# Altium PCB LaserProtection_V10.PcbDoc
Units mm, origin at the board's own origin, x right, y up, seen from the top; angles counter-clockwise.
Board outline 70 x 57 mm, 4 copper layers (Top Layer, Signal Layer 1, Signal Layer 2, Bottom Layer), stack 1.538 mm thick; 101 components, 52 nets, 241 pads, 243 vias.
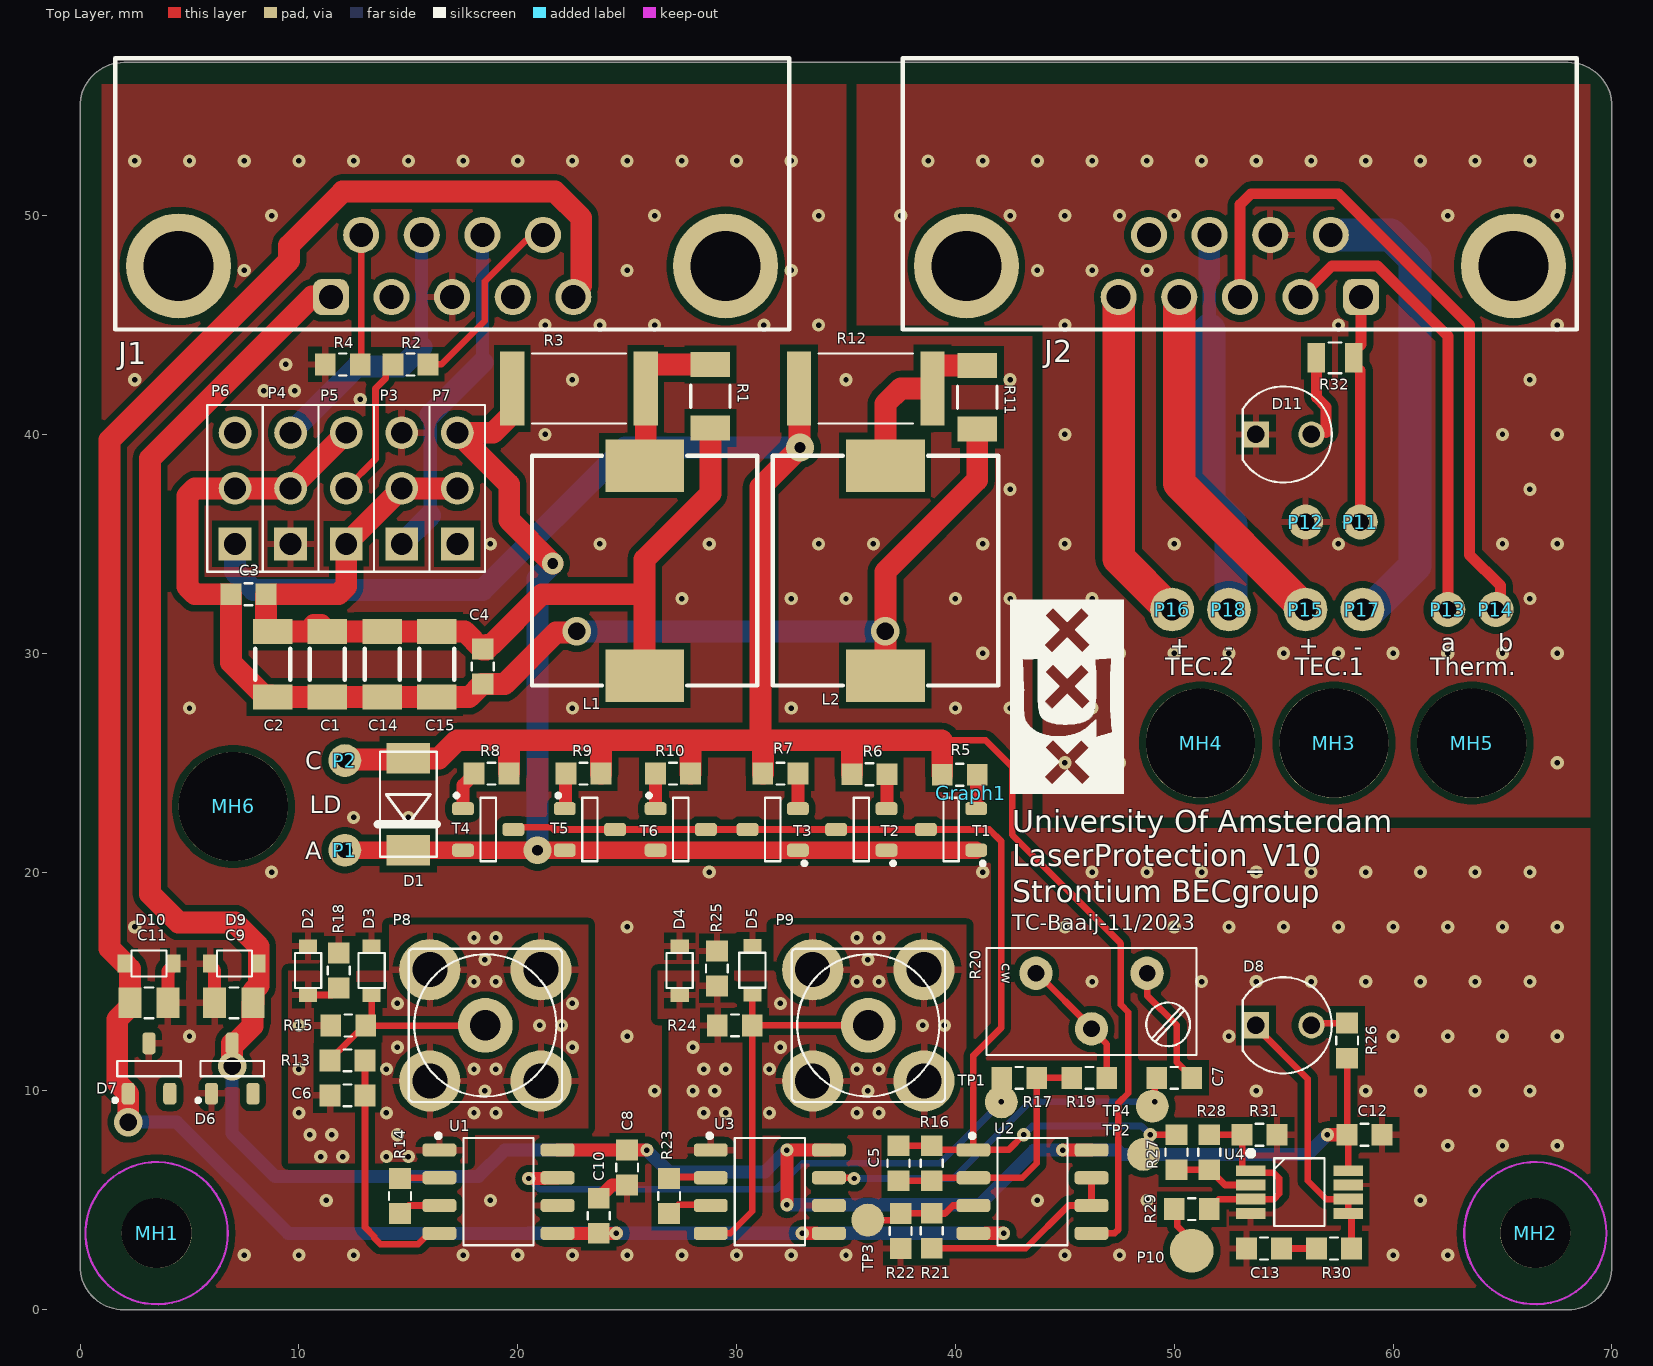
[diagram p0: Top Layer view]
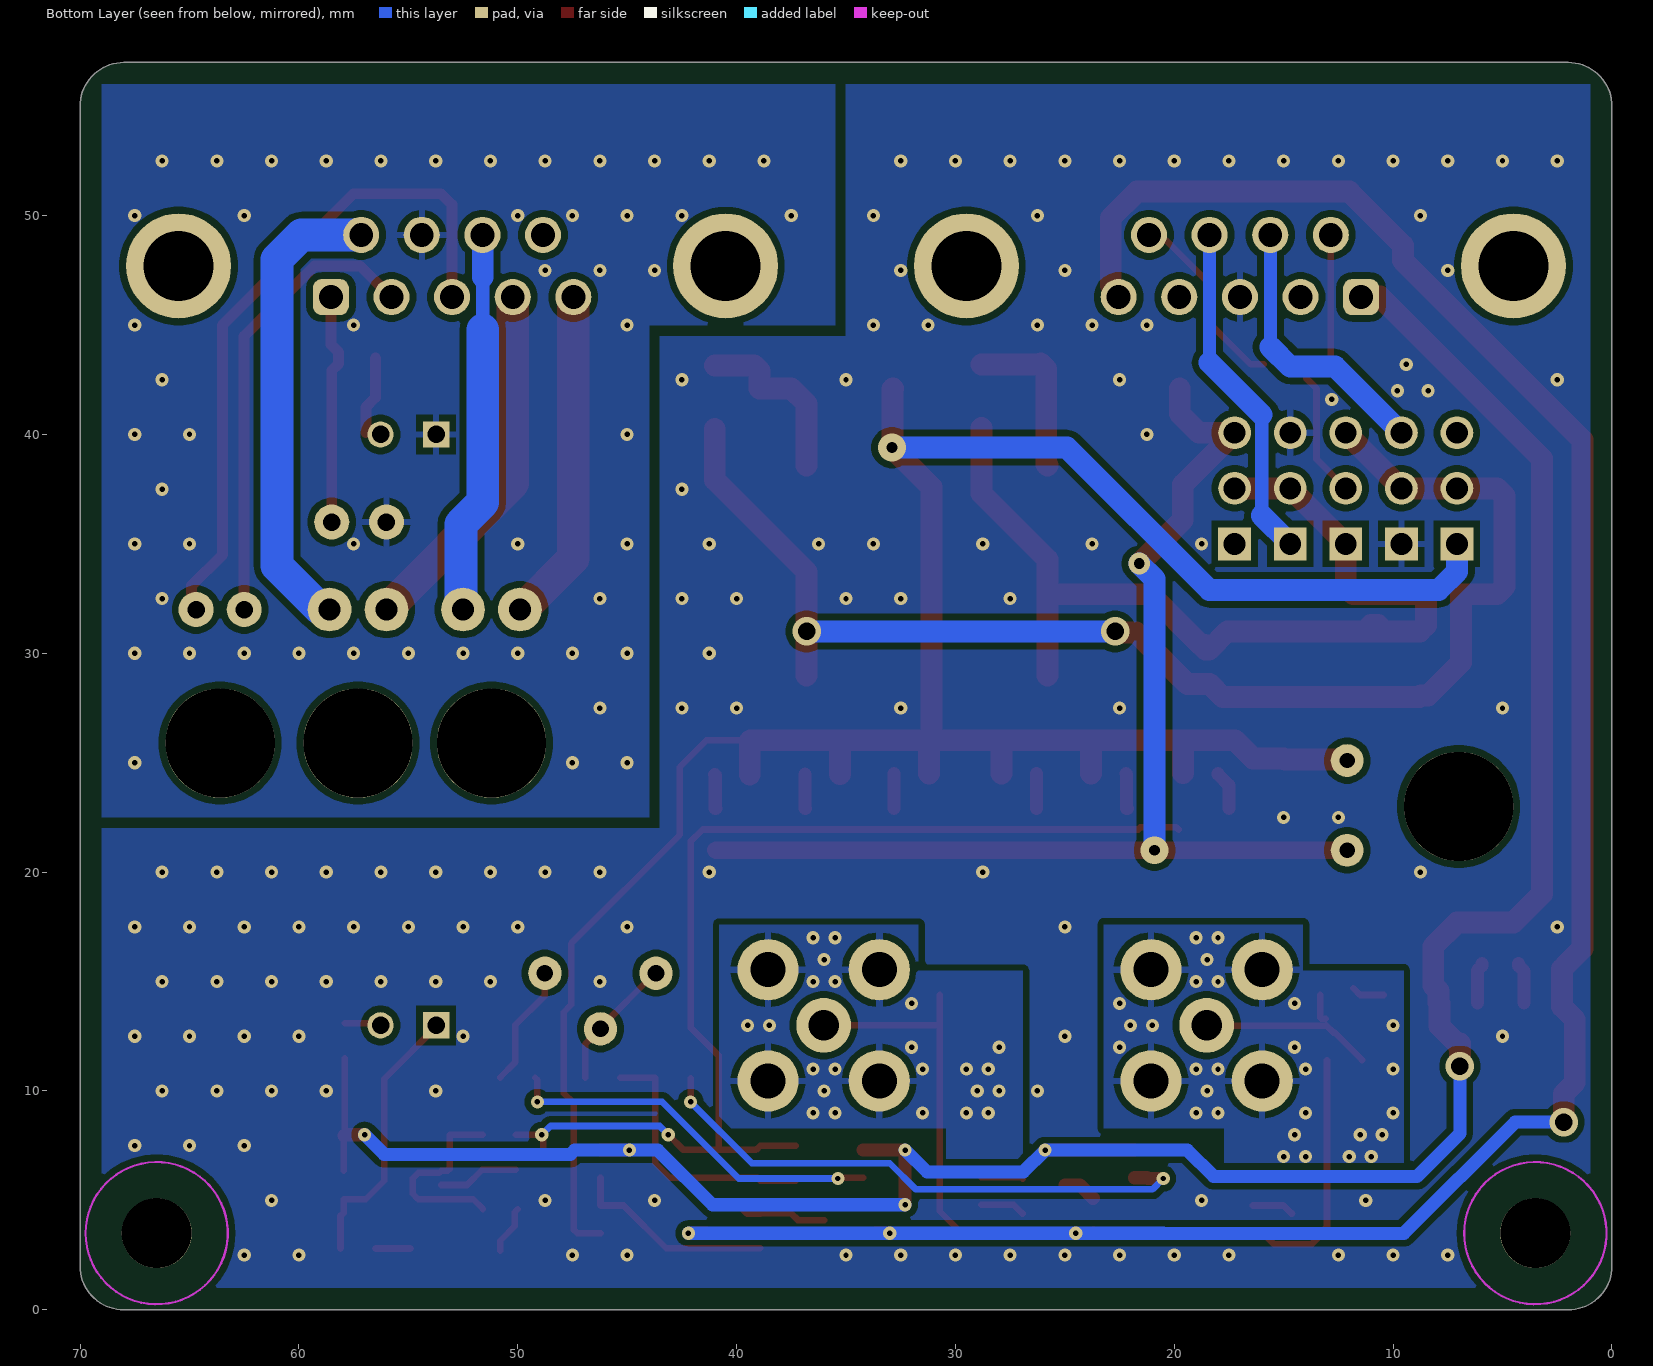
[diagram p1: Bottom Layer view, seen from below]

## Layer stack, top to bottom
Top Solder: solder mask 0.0102, Solder Resist, Dk 3.5
Top Layer: signal copper 0.018
Dielectric1: prepreg 0.36, FR-4, Dk 4.8
Signal Layer 1: signal copper 0.036
Dielectric 3: core 0.71, Dk 4.2
Signal Layer 2: signal copper 0.036
Dielectric 2: prepreg 0.36, Dk 4.8
Bottom Layer: signal copper 0.018
Bottom Solder: solder mask 0.0102, Solder Resist, Dk 3.5

## Board outline
0,2 0,55 cw(c2,55) 2,57 68,57 cw(c68,55) 70,55 70,2 cw(c68,2) 68,0 2,0 cw(c2,2)

## Design rules (kind name [scope] priority, off if disabled: settings)
BoardOutlineClearance BoardOutlineClearance-Inner [OnCopper and not (OnBottom or OnTop)] p1: gap=0.4 ignorepadtopadclearanceinfootprint=FALSE except(0: Arc-SplitContinuation Track-SplitContinuation SMDPad-SplitContinuation THPad-SplitContinuation Via-SplitContinuation Fill-SplitContinuation Poly-SplitContinuation Region-SplitContinuation Text-SplitContinuation)
BoardOutlineClearance BoardOutlineClearance-TopBot [OnCopper and (OnTop or OnBottom)] p2: gap=0.25 ignorepadtopadclearanceinfootprint=FALSE except(0: Arc-SplitContinuation Track-SplitContinuation SMDPad-SplitContinuation THPad-SplitContinuation Via-SplitContinuation Fill-SplitContinuation Poly-SplitContinuation Region-SplitContinuation Text-SplitContinuation)
Clearance [All] p1: gap=0.15 ignorepadtopadclearanceinfootprint=FALSE except(0: Arc-Hole Track-Hole SMDPad-Hole THPad-Hole Via-Hole Fill-Hole Poly-Hole Region-Hole Text-Hole; 0.3: Arc-Fill Arc-Poly Arc-Region Track-Fill Track-Poly Track-Region SMDPad-Fill SMDPad-Poly SMDPad-Region THPad-Fill THPad-Poly THPad-Region Via-Fill Via-Poly Via-Region Fill-Fill Fill-Poly Fill-Region Poly-Poly Poly-Region Region-Region)
ComponentClearance [All] p1: gap=0.01 collisioncheckmode=3 verticalgap=0.25 showdistances=FALSE
DiffPairsRouting DiffPairsRouting-100 [All] p1: maxlimit=0.15 minlimit=0.15 mostfreqgap=0.15 toplayer_minwidth=0.15 toplayer_maxwidth=0.42 toplayer_prefwidth=0.42 midlayer1_minwidth=0.15 midlayer1_maxwidth=0.42 midlayer1_prefwidth=0.42 midlayer2_minwidth=0.15 midlayer2_maxwidth=0.42 midlayer2_prefwidth=0.42 bottomlayer_minwidth=0.15 bottomlayer_maxwidth=0.42 bottomlayer_prefwidth=0.42 maxuncoupledlength=12.5
Height [All] p1: minheight=0 maxheight=25 prefheight=12.5
HoleSize HoleSize-PTH [(ObjectKind = 'Via')] p1: absolutevalues=TRUE maxlimit=20 minlimit=0.25 maxpercent=80.000 minpercent=20.000
HoleSize [All] p2: absolutevalues=TRUE maxlimit=20 minlimit=0.35 maxpercent=80.000 minpercent=20.000
HoleToHoleClearance [All] p1: gap=0.15 allowstackedmicrovias=TRUE
MinimumAnnularRing "Minimum IAR" [((ObjectKind = 'Pad') OR (ObjectKind = 'Via')) And (Layer = 'MultiLayer')] p1: minimumring=0.125 // minimum inner annular ring for pads finished hole size
MinimumSolderMaskSliver [All] p1: minsoldermaskwidth=0.08
PlaneClearance PlaneClearance-IPI [All] p1: clearance=0.4
PlaneConnect [All] p1: planeconnectstyle=Relief reliefexpansion=0.4 reliefentries=4 reliefconductorwidth=0.2 reliefairgap=0.2
PolygonConnect PolygonConnect_NR [IsPolygon AND (Name Like '*_NR')] p1: connectstyle=Direct reliefconductorwidth=0.254 reliefentries=4 polygonreliefangle="90 Angle" airgapwidth=0.254
PolygonConnect PolygonConnect_NR_VIA [IsPolygon vs isvia] p2: connectstyle=Direct reliefconductorwidth=0.254 reliefentries=4 polygonreliefangle="90 Angle" airgapwidth=0.254
PolygonConnect [All] p3: connectstyle=Relief reliefconductorwidth=0.3 reliefentries=4 polygonreliefangle="90 Angle" airgapwidth=0.3
RoutingCorners [All] p1: cornerstyle=45-Degree minsetback=2.5 maxsetback=2.5
RoutingVias [(ObjectKind = 'Via')] p1: holewidth=0.25 width=0.6 viastyle="Through Hole" minholewidth=0.25 minwidth=0.6 maxholewidth=0.8 maxwidth=1.5 // Finished Hole Size [TvR]
SilkToSilkClearance [All] p1: silktosilkclearance=0.2
SilkToSolderMaskClearance SilkscreenOverComponentPads [IsPad] p1: minsilkscreentomaskgap=0.15 clearancetoexposedcopper=TRUE
SolderMaskExpansion [All] p1: expansion=0.07 istentingtop=FALSE
Width [All] p1: maxlimit=10 minlimit=0.15 preferedwidth=0.2
19 further rules are at their usual default settings.

## Components (designator, comment, footprint, x,y, rotation, side; value= is the part's Value field where it differs from the comment)
C1 "100u 10V" cap1206MD 11.3,29.5 r270 top
C2 "100u 10V" cap1206MD 8.8,29.5 r270 top
C3 "100n 50V" cap0603MD 7.7,32.7 r180 top
C4 "100n 50V" cap0603MD 18.4,29.4 r270 top
C5 "5p 50V" cap0603MD 37.4,6.7 r90 top
C6 "1n5 50V" cap0603MD 12.22,9.8 r180 top
C7 "1u 50V" cap0603MD 50,10.6 r0 top
C8 "1u 50V" cap0603MD 25,6.5 r90 top
C9 "10u 25V" cap0805MD 7.025,14.025 r0 top
C10 "1u 50V" cap0603MD 23.7,4.3 r90 top
C11 "10u 25V" cap0805MD 3.15,14.025 r0 top
C12 "1u 50V" cap0603MD 58.7,8 r0 top
C13 "10u 10V" cap0603MD 54.1,2.8 r180 top
C14 "100u 10V" cap1206MD 13.8,29.5 r270 top
C15 "100u 10V" cap1206MD 16.3,29.5 r270 top
D1 "RSX058LAP2STR" SODFL470X110-2N 15,23.1 r90 top
D2 "PESD12VL1BA,115" SOD-323-2-NoPol 10.42,15.5 r270 top
D3 "PESD12VL1BA,115" SOD-323-2-NoPol 13.32,15.5 r270 top
D4 "PESD12VL1BA,115" SOD-323-2-NoPol 27.4,15.5 r270 top
D5 "PESD12VL1BA,115" SOD-323-2-NoPol 30.72,15.515 r270 top
D6 "PLVA665A,215" SOT95P230X110-3N 6.95,11.025 r90 top
D7 "PLVA665A,215" SOT95P230X110-3N 3.15,11.025 r90 top
D8 "3mm" LED_3mm 55,13 r0 top
D9 "PESD12VL1BA,115" SOD-323-2-NoPol 7.05,15.825 r0 top
D10 "PESD12VL1BA,115" SOD-323-2-NoPol 3.15,15.825 r0 top
D11 "3mm" LED_3mm 55,40 r0 top
Graph1 "UvA Logo" UVA_LOGO_SMALL_HOR 40.7,23.6 r0 top
J1 "182-009-213R531" 182-009-213Ryy1 17,51 r180 top locked
J2 "182-009-113R531" 182-009-113Ryy1 53,51 r180 top locked
L1 "22uH 3.6A" INDP102100X51N 25.8,33.78 r90 top
L2 "22uH 3.6A" INDP102100X51N 36.8,33.78 r90 top
MH1 "M3 (3.2mm - NP)" "MountHole M3 NP keepout 6_5mm" 3.5,3.5 r90 top
MH2 "M3 (3.2mm - NP)" "MountHole M3 NP keepout 6_5mm" 66.5,3.5 r90 top
MH3 "5.0mm - NP" "MountHole 5mm NP No keepout" 57.3,25.9 r90 top
MH4 "5.0mm - NP" "MountHole 5mm NP No keepout" 51.2,25.9 r90 top
MH5 "5.0mm - NP" "MountHole 5mm NP No keepout" 63.6,25.9 r0 top
MH6 "5.0mm - NP" "MountHole 5mm NP No keepout" 7,23 r0 top
P1 "SolderPad" Pad_PT_c15h07mm 12.1,21 r90 top
P2 "SolderPad" Pad_PT_c15h07mm 12.1,25.1 r90 top
P3 "Header 2.54" Header254-1x3 14.7,35 r90 top
P4 "Header 2.54" Header254-1x3 9.62,35 r90 top
P5 "Header 2.54" Header254-1x3 12.16,35 r90 top
P6 "Header 2.54" Header254-1x3 7.08,35 r90 top
P7 "Header 2.54" Header254-1x3 17.24,35 r90 top
P8 "SMA" PCB114SMAFSTJ 18.52,13 r90 top
P9 "SMA" PCB114SMAFSTJ 36.02,13 r90 top
P10 "SolderPad" Pad_SMD_c20mm 50.8,2.7 r90 top
P11 "SolderPad" Pad_PT_c16h08mm 58.5,36 r90 top
P12 "SolderPad" Pad_PT_c16h08mm 56,36 r90 top
P13 "SolderPad" Pad_PT_c16h08mm 62.5,32 r90 top
P14 "SolderPad" Pad_PT_c16h08mm 64.7,32 r90 top
P15 "SolderPad" Pad_PT_c20h10mm 56,32 r90 top
P16 "SolderPad" Pad_PT_c20h10mm 49.9,32 r90 top
P17 "SolderPad" Pad_PT_c20h10mm 58.6,32 r90 top
P18 "SolderPad" Pad_PT_c20h10mm 52.5,32 r90 top
R1 "2K2" res1206MD 28.8,41.75 r90 top
R2 "10K" res0603MD 15.1,43.2 r180 top
R3 "4R7" RES2512MD 22.8,42.1 r180 top
R4 "10K" res0603MD 12,43.2 r180 top
R5 "10R" res0603MD 40.2,24.45 r0 top
R6 "10R" res0603MD 36.074,24.474 r0 top
R7 "10R" res0603MD 32,24.5 r0 top
R8 "10R" res0603MD 18.8,24.5 r180 top
R9 "10R" res0603MD 23,24.5 r180 top
R10 "10R" res0603MD 27.1,24.5 r180 top
R11 "2K2" res1206MD 41,41.7 r90 top
R12 "4R7" RES2512MD 35.9,42.1 r180 top
R13 "10K" res0603MD 12.22,11.4 r0 top
R14 "560K" res0603MD 14.62,5.2 r270 top
R15 "1M" res0603MD 12.253,12.992 r0 top
R16 "4K7" res0603MD 38.92,6.7 r90 top
R17 "4K7" res0603MD 42.92,10.6 r0 top
R18 "100R" res0603MD 11.82,15.5 r270 top
R19 "4K7" res0603MD 46.12,10.6 r180 top
R20 "5K/25T" "Bourns 3296Y" 46.22,12.841 r180 top
R21 "4K7" res0603MD 38.92,3.615 r90 top
R22 "4K7" res0603MD 37.5,3.6 r90 top
R23 "560K" res0603MD 26.92,5.2 r270 top
R24 "1M" res0603MD 29.92,13 r0 top
R25 "100R" res0603MD 29.1,15.6 r270 top
R26 "4K7" res0603MD 57.9,12.3 r90 top
R27 "<Value>" res0603MD 50.1,7.2 r270 top
R28 "<Value>" res0603MD 51.6,7.2 r90 top
R29 "<Value>" res0603MD 50.8,4.6 r0 top
R30 "270R" res0603MD 57.3,2.8 r0 top
R31 "<Value>" res0603MD 53.9,8 r0 top
R32 "<Value>" res0805HD 57.35,43.5 r180 top
T1 "MMBF5103" SOT95P230X110-3N 39.8,21.95 r180 top
T2 "MMBF5103" SOT95P230X110-3N 35.7,21.95 r180 top
T3 "MMBF5103" SOT95P230X110-3N 31.65,21.95 r180 top
T4 "MMBF4093" SOT95P230X110-3N 18.65,21.95 r0 top
T5 "MMBF4093" SOT95P230X110-3N 23.3,21.95 r0 top
T6 "MMBF4093" SOT95P230X110-3N 27.45,21.95 r0 top
TP1 "Testpoint" Testpoint_1mm5 42.1,9.5 r0 top
TP2 "Testpoint" Testpoint_1mm5 48.6,7.1 r90 top
TP3 "Testpoint" Testpoint_1mm5 36,4.1 r90 top
TP4 "Testpoint" Testpoint_1mm5 49,9.3 r90 top
U1 "INA821ID" SOIC127P600X175-8N 19.12,5.4 r0 top
U2 "OPA2145IDR" SOIC127P600X175-8N 43.52,5.4 r0 top
U3 "INA821ID" SOIC127P600X175-8N 31.52,5.4 r0 top
U4 "MC33161DMR2G" TSOP65P490X110-8N 55.719,5.379 r0 top

## Footprints (in the part's own frame and the unit in brackets; to place one, negate y for a bottom-side part, rotate by r counter-clockwise, add the part's x,y. Pads: shape width x height; smd on the part's side, far side on the other; paste and mask are expansions set on the pad)
182-009-113Ryy1 [mm] "NorComp, 9 pins, male, right angled"
  rrect50% 1.65x1.65 hole 1.09: 1(-5.54,4.72)
  round 1.65 hole 1.09: 2(-2.77,4.72) 3(0,4.72) 4(2.77,4.72) 5(5.54,4.72) 6(-4.155,1.88) 7(-1.385,1.88) 8(1.385,1.88) 9(4.155,1.88)
  round 4.8 hole 3.2: M1(-12.5,3.3) M2(12.5,3.3)
  silkscreen extent -15.4,-6.2 15.4,6.2, body extent -15.4,-12.29 15.41,6.2, height 12.55
182-009-213Ryy1 [mm] "NorComp, 9 pins, female, right angled"
  rrect50% 1.65x1.65 hole 1.09: 1(5.54,4.72)
  round 1.65 hole 1.09: 2(2.77,4.72) 3(0,4.72) 4(-2.77,4.72) 5(-5.54,4.72) 6(4.155,1.88) 7(1.385,1.88) 8(-1.385,1.88) 9(-4.155,1.88)
  round 4.8 hole 3.2: M1(-12.5,3.3) M2(12.5,3.3)
  silkscreen extent -15.4,-6.2 15.4,6.2, body extent -15.41,-12.32 15.41,6.2, height 12.55
"Bourns 3296Y" [mil] "Bourns Upright 3296Y series thruhole trimpot multiturn"
  round 60 hole 30: 1(-100,-100) 2(0,0) 3(100,-100)
  silkscreen extent -189,-146 189,47, body extent -188,-144 188,44, height 455
cap0603MD [mm]
  rect 0.95x1 smd: 1(-0.8,0) 2(0.8,0)
  silkscreen extent -0.18,-0.5 0.18,0.5, body extent -0.9,-0.5 0.9,0.5, height 0.8
cap0805MD [mm]
  rect 1.05x1.4 smd: 1(-0.875,0) 2(0.875,0)
  silkscreen extent -0.2,-0.7 0.2,0.7, body extent -1.05,-0.7 1.05,0.7, height 1.25
cap1206MD [mm]
  rect 1.15x1.8 smd: 1(-1.5,0) 2(1.5,0)
  silkscreen extent -0.7,-0.8 0.7,0.8, body extent -1.7,-0.9 1.7,0.9, height 1.8
Header254-1x3 [mm] "Header 2.54 1x4"
  rect 1.5x1.5 hole 1: 1(0,0)
  round 1.5 hole 1: 2(2.54,0) 3(5.08,0)
  silkscreen extent -1.27,-1.27 6.35,1.27, body extent -1.27,-1.22 6.35,1.22, height 8.64
INDP102100X51N [mm] "Precision Wire Wound Inductor, 2-Leads, Body 10.20x10.00mm, IPC Medium Density"
  rect 2.4x3.6 smd: 1(-4.8,0) 2(4.8,0)
  silkscreen extent -5.25,-5.15 5.25,5.15, body extent -5.15,-5.1 5.15,5.1, height 5
LED_3mm [mm]
  rect 1.2x1.2 hole 0.8: 1(-1.27,0)
  round 1.2 hole 0.8: 2(1.27,0)
  silkscreen extent -1.87,-2.2 2.2,2.2, body extent -1.6,-1.9 1.9,1.9, height 14.5
"MountHole 5mm NP No keepout" [mm]
  round 5 hole 5 unplated: 0(0,0)
"MountHole M3 NP keepout 6_5mm" [mm]
  round 3.2 hole 3.2 unplated: 0(0,0)
  Top Layer pour cut-out: -3.3,0 -3.049,-1.263 -2.333,-2.333 -1.263,-3.049 0,-3.3 0,-3.3 1.65,-2.858 2.858,-1.65 3.3,0 3.3,0 2.858,1.65 1.65,2.858 0,3.3 0,3.3 -1.65,2.858 -2.858,1.65 -3.3,0
  Bottom Layer pour cut-out: -3.3,0 -3.049,-1.263 -2.333,-2.333 -1.263,-3.049 0,-3.3 0,-3.3 1.65,-2.858 2.858,-1.65 3.3,0 3.3,0 2.858,1.65 1.65,2.858 0,3.3 0,3.3 -1.65,2.858 -2.858,1.65 -3.3,0
  Keep-Out Layer circle w0.1: c0,0 r3.25
Pad_PT_c15h07mm [mm] "Pad_PT_c15h07mm"
  round 1.5 hole 0.7: 1(0,0)
Pad_PT_c16h08mm [mm] "Pad_PT_c16h08mm"
  round 1.6 hole 0.8: 1(0,0)
Pad_PT_c20h10mm [mm] "Pad_PT_c20h10mm"
  round 2 hole 1: 1(0,0)
Pad_SMD_c20mm [mm] "Pad_SMD_c2.0mm"
  round 2 smd: 1(0,0)
PCB114SMAFSTJ [mm] "SMA Coaxial Straight Jack, 11.4mm thread, Through Hole"
  round 2.5 hole 1.4: 1(0,0)
  round 2.8 hole 1.6: 2(-2.54,-2.54) 2(-2.54,2.54) 2(2.54,-2.54) 2(2.54,2.54)
  silkscreen extent -3.5,-3.5 3.5,3.5, body extent -3.5,-3.5 3.5,3.5, height 16.18
res0603MD [mm]
  rect 0.95x1 smd: 1(-0.8,0) 2(0.8,0)
  silkscreen extent -0.18,-0.5 0.18,0.5, body extent -0.9,-0.5 0.9,0.5, height 0.5
res0805HD [mm]
  rect 0.8x1.35 smd: 1(-0.85,0) 2(0.85,0)
  silkscreen extent -0.3,-0.7 0.3,0.7, body extent -1.05,-0.7 1.05,0.7, height 0.65
res1206MD [mm] "Chip Resistor, 2-Leads, Body 3.10x1.60mm, IPC Medium Density"
  rect 1.15x1.8 smd: 1(-1.45,0) 2(1.45,0)
  silkscreen extent -0.5,-0.9 0.5,0.9, body extent -1.6,-0.8 1.6,0.8, height 0.6
RES2512MD [mm]
  rect 1.1x3.4 smd: 1(-3.05,0) 2(3.05,0)
  silkscreen extent -2.15,-1.6 2.15,1.6, body extent -3.15,-1.6 3.15,1.6, height 0.7
SOD-323-2-NoPol [mm]
  rect 0.63x0.83 smd mask+0.01: 1(-1.115,0) 2(1.115,0)
  silkscreen extent -0.8,-0.6 0.8,0.6, body extent -1.35,-0.7 1.35,0.7, height 0.81
SODFL470X110-2N [mm] "SODFL, 2-Leads, Body 2.45x4.70mm, IPC Medium Density / Also named SOD-128"
  rect 1.4x2 smd mask+0.05: 1(-2.1,0) 2(2.1,0)
  silkscreen extent -2.4,-1.3 2.4,1.4, body extent -2.35,-1.25 2.35,1.25, height 1.2
SOIC127P600X175-8N [mm]
  rrect50% 1.55x0.6 smd: 1(-2.7,1.905) 2(-2.7,0.635) 3(-2.7,-0.635) 4(-2.7,-1.905) 5(2.7,-1.905) 6(2.7,-0.635) 7(2.7,0.635) 8(2.7,1.905)
  silkscreen extent -2.82,-2.45 1.6,2.62, body extent -3,-2.45 3,2.45, height 1.75
SOT95P230X110-3N [mm]
  rrect50% 1x0.6 smd: 1(-1.15,0.95) 2(-1.15,-0.95) 3(1.15,0)
  silkscreen extent -1.5,-1.45 0.35,1.6, body extent -1.22,-1.45 1.22,1.45, height 1
Testpoint_1mm5 [mm] "TestPoint SMD 1.5mm"
  round 1.5 smd: 1(0,0)
TSOP65P490X110-8N [mm] "TSOP, 8-Leads, Body 3.00x3.00mm, Pitch 0.65mm, IPC Medium Density"
  rect 1.35x0.5 smd mask+0: 1(-2.225,0.975) 2(-2.225,0.325) 3(-2.225,-0.325) 4(-2.225,-0.975) 5(2.225,-0.975) 6(2.225,-0.325) 7(2.225,0.325) 8(2.225,0.975)
  silkscreen extent -2.35,-1.55 1.15,1.9, body extent -2.45,-1.55 2.45,1.55, height 1.1
UVA_LOGO_SMALL_HOR [mm]
  silkscreen extent 1.8,0 7,8.84

## Part data
C1 C2 C14 C15: library part C3216X5R1A107M160AC, "MLCC 100 µF, 10 V, 1206 [3216 Metric], ± 20%, X5R", Capacitance=100u, Manufacturer=TDK, Supplier Part Number 1=2211193, Author=EB, Checked by=Unchecked, CreationDate="31-Oct-23 12:19:33", id=82, ManufacturerCode=C3216X5R1A107M160AC, MyComment="100u 10V", Partname=C3216X5R1A107M160AC, Precision=20%, Supplier 1=Farnell, Type=Capacitor
C3 C4: library part Cap0603MD_100n_X7R_50V_10%, Capacitance=100n, Supplier Part Number 1=2581046, Voltage=50V, Author=TvR, Checked by=Unchecked, CreationDate="31-Mar-16 14:01:33", id=12, MyComment="100n 50V", Partname=Cap0603MD_100n_X7R_50V_10%, Precision=10%, Supplier 1=Farnell, Type=X7R
C5: library part Cap0603MD_5p_NP0_50V_5%, Capacitance=5p, Supplier Part Number 1=1759046, Voltage=50V, Author=Twe, Checked by=Unchecked, CreationDate="09-Sep-16 09:35:37", id=163, MyComment="5p 50V", Partname=Cap0603MD_5p_NP0_50V_5%, Precision=5%, Supplier 1=Farnell, Type=NP0
C6: library part Cap0603MD_1n5_NP0_50V_5%, Capacitance=1n5, Voltage=50V, Author=EB, Checked by=Unchecked, CreationDate="29-Jan-18 11:34:27", id=157, MyComment="1n5 50V", Partname=Cap0603MD_1n5_NP0_50V_5%, Precision=5%, Supplier 1=Farnell, Type=NP0
C7 C8 C10 C12: library part Cap0603MD_1u_X5R_50V_10%, Capacitance=1u, Supplier Part Number 1=3013383, Voltage=50V, Author=Twe, Checked by=Unchecked, CreationDate=23-Mar-20, id=123, MyComment="1u 50V", Partname=Cap0603MD_1u_X5R_50V_10%, Precision=10%, Supplier 1=Farnell, Type=X5R
C9 C11: library part Cap0805MD_10u_X5R_25V_10%, Capacitance=10u, Supplier Part Number 1=1735530, Voltage=25V, Author=EB, Checked by=Unchecked, CreationDate="31-Mar-16 14:12:18", id=146, MyComment="10u 25V", Partname=Cap0805MD_10u_X5R_25V_10%, Precision=10%, Supplier 1=Farnell, Type=5XR
C13: library part Cap0603MD_10u_X7R_10V_10%, Capacitance=10u, Supplier Part Number 1=81-GRM188Z71A106KA3D, Voltage=10V, Author=EB, Checked by=Unchecked, CreationDate="09-Sep-16 09:42:50", id=51, MyComment="10u 10V", Partname=Cap0603MD_10u_X7R_10V_10%, Precision=10%, Supplier 1=Mouser, Type=X7R
D1: "Schottky Diode, 3A, 200V, Vf=0.84 (3A/35C), Ir=5-100nA", Manufacturer=ROHM, Supplier Part Number 1=755-RSX058LAP2STR, Author=EB, Checked by=Unchecked, CreationDate="17-Sep-19 11:02:04", id=65, ManufacturerCode=RSX058LAP2STR, MyComment=RSX058LAP2STR, Partname=RSX058LAP2STR, Supplier 1=Mouser, Type=Schottky
D2 D3 D4 D5 D9 D10: "TVS Diode, Bidirectional, 12V, SOD-323, 2 Pins", Manufacturer=Nexperia, Supplier Part Number 1=8737363, Author=EB, Checked by=Unchecked, CreationDate="13-Oct-22 11:22:44", id=49, ManufacturerCode=PESD12VL1BA,115, MyComment=PESD12VL1BA,115, Partname=PESD12VL1BA,115, Supplier 1=Farnell, Type=TVS
D6 D7: "Zener 6v5, 250mW, 3%, SOT-23", Manufacturer=Rohm, Supplier Part Number 1=771-PLVA665A215, Author=EB, Checked by=Unchecked, CreationDate="28-Jul-23 14:37:29", id=64, ManufacturerCode=PLVA665A,215, MyComment=PLVA665A,215, Partname=PLVA665A,215, Supplier 1=Mouser, Type=Zener
D8 D11: library part LED_3mm, "Generic 3mm LED Footprint", Manufacturer=Wurth, ManufacturerCode=151031SS04000, Supplier Part Number 1=710-151031SS04000, Author=EB, Checked by=Unchecked, CreationDate="26-May-16 08:35:38", id=39, MyComment=3mm, Partname=LED_3mm, Supplier 1=Mouser, Type=LED
Graph1: library part UvA_Logo_Small_horizontal, "University of Amsterdam Logo", Author=EB, Checked by=PCB, CreationDate="31-Mar-16 13:43:00", id=158, MyComment="UvA Logo", Partname=UvA_Logo_Small_horizontal, Supplier 1="<no part>", Type=Logo
J1: "NorComp, D-SUB, 9 pins, Female, right angled PCB", Manufacturer=NorComp, Supplier Part Number 1=2294288, Author=EB, Checked by=Unchecked, CreationDate="30-Oct-23 15:57:50", id=167, ManufacturerCode=182-009-213R531, MyComment=182-009-213R531, Partname=182-009-213R531, Supplier 1=Farnell, Type=D-Sub
J2: "NorComp, D-SUB, 9 pins, Male, right angled PCB", Manufacturer=NorComp, Supplier Part Number 1=2294285, Author=EB, Checked by=Unchecked, CreationDate="30-Oct-23 15:57:50", id=166, ManufacturerCode=182-009-113R531, MyComment=182-009-113R531, Partname=182-009-113R531, Supplier 1=Farnell, Type=D-Sub
L1 L2: library part MSS1048T-223MLC, "Power Inductor, SMD, 22 µH, 3.58 A, Shielded, 2.36 A", Current=3.6A, Inductance=22uH, Manufacturer=Coilcraft, Supplier Part Number 1=2288292, Author=EB, Checked by=Unchecked, CreationDate="11-Oct-23 12:11:13", id=60, ManufacturerCode=MSS1048T-223MLC, MyComment="22uH 3.6A", Partname=MSS1048T-223MLC, Precision=20%, Supplier 1=Farnell, Type=Inductor
MH1 MH2: library part "MountingHole M3 NP", "MountingHole NP for M3, drill 3.2mm, keepout dia 6.5", Author=EB, Checked by=Unchecked, CreationDate="12-Dec-22 11:28:31", id=146, MyComment="M3 (3.2mm - NP)", Partname="MountingHole M3 NP", Supplier 1=Farnell, Type="Hole NP"
MH3 MH4 MH5 MH6: library part "MountingHole 5.0mm No keepout", "MountingHole 5mm No keepout", Author=EB, Checked by=Unchecked, CreationDate="12-Dec-22 11:28:31", id=161, MyComment="5.0mm - NP", Partname="MountingHole 5.0mm No keepout", Supplier 1=Farnell, Type="Hole NP"
P1 P2: library part SolderPad_PT_c1.5h0.7mm, "SolderPad_PT_c1.5h0.7mm", Author=EB, Checked by=Unchecked, CreationDate="29-Oct-20 13:08:52", id=83, MyComment=SolderPad, Partname=SolderPad_PT_c1.5h0.7mm, Supplier 1=Farnell, Type=SolderPad
P3 P4 P5 P6 P7: library part Header254-1x3, "Header 2.54p 1x3", Supplier Part Number 1=1022248, Author=Twe, Checked by=PCB, CreationDate="11-Apr-16 15:00:36", id=33, MyComment="Header 2.54", Partname=Header254-1x3, Supplier 1=Farnell, Type=Header
P8 P9: library part PCB.114SMAFSTJ.A, "SMA Coaxial, 17.7mm, 50 Ohm, Straight Jack, Through Hole", Manufacturer=Taoglas, Supplier Part Number 1=960-PCB.114SMAFSTJ.A, Author=EB, Checked by=Unchecked, CreationDate="31-Mar-16 12:11:50", id=150, ManufacturerCode=PCB.114SMAFSTJ.A, MyComment=SMA, Partname=PCB.114SMAFSTJ.A, Supplier 1=Mouser, Type=SMA
P10: library part SolderPad_SMD_c2.0mm, "SolderPad_SMD_c2.0mm", Author=EB, Checked by=Unchecked, CreationDate="29-Oct-20 13:45:41", id=87, MyComment=SolderPad, Partname=SolderPad_SMD_c2.0mm, Supplier 1=Farnell, Type=SolderPad
P11 P12 P13 P14: library part SolderPad_PT_c1.6h0.8mm, "SolderPad_PT_c1.6h0.8mm", Author=EB, Checked by=Unchecked, CreationDate="29-Oct-20 13:08:52", id=84, MyComment=SolderPad, Partname=SolderPad_PT_c1.6h0.8mm, Supplier 1=Farnell, Type=SolderPad
P15 P16 P17 P18: library part SolderPad_PT_c2.0h1.0mm, "SolderPad_PT_c2.0h1.0mm", Author=EB, Checked by=Unchecked, CreationDate="29-Oct-20 13:08:52", id=86, MyComment=SolderPad, Partname=SolderPad_PT_c2.0h1.0mm, Supplier 1=Farnell, Type=SolderPad
R1 R11: library part Res1206MD_2K2_1%, Author=EB, Checked by=Unchecked, CreationDate="30-Mar-16 10:33:13", id=538, MyComment=2K2, Partname=Res1206MD_2K2_1%, Precision=1%, Resistance=2K2, Supplier 1=Farnell
R2 R4 R13: library part Res0603MD_10K_1%, Supplier Part Number 1=2446547, Author=TvR, Checked by=Unchecked, CreationDate="30-Mar-16 10:33:13", id=336, MyComment=10K, Partname=Res0603MD_10K_1%, Precision=1%, Resistance=10K, Supplier 1=Farnell
R3 R12: library part RC2512JK-7W4R7L, "SMD Chip Resistor, 4.7 ohm, ± 5%, 2 W, 2512", Manufacturer=Yageo, Supplier Part Number 1=1376977, Author=EB, Checked by=Unchecked, CreationDate="11-Oct-23 12:33:08", id=72, ManufacturerCode=RC2512JK-7W4R7L, MyComment=4R7, Partname=RC2512JK-7W4R7L, Precision=5%, Resistance=4R7, Supplier 1=Farnell
R5 R6 R7 R8 R9 R10: library part Res0603MD_10R_1%, Supplier Part Number 1=2447233, Author=Twe, Checked by=Unchecked, CreationDate="30-Mar-16 10:33:13", id=265, MyComment=10R, Partname=Res0603MD_10R_1%, Precision=1%, Resistance=10R, Supplier 1=Farnell
R14 R23: library part Res0603MD_560K_1%, Supplier Part Number 1=9331379, Author=Twe, Checked by=Unchecked, CreationDate="30-Mar-16 10:33:13", id=378, MyComment=560K, Partname=Res0603MD_560K_1%, Precision=1%, Resistance=560K, Supplier 1=Farnell
R15 R24: library part Res0603MD_1M_1%, Supplier Part Number 1=2447285, Author=Twe, Checked by=Unchecked, CreationDate="30-Mar-16 10:33:13", id=384, MyComment=1M, Partname=Res0603MD_1M_1%, Precision=1%, Resistance=1M, Supplier 1=Farnell
R16 R17 R19 R21 R22 R26: library part Res0603MD_4K7_1%, Supplier Part Number 1=2447385, Author=Twe, Checked by=Unchecked, CreationDate="30-Mar-16 10:33:13", id=328, MyComment=4K7, Partname=Res0603MD_4K7_1%, Precision=1%, Resistance=4K7, Supplier 1=Farnell
R18 R25: library part Res0603MD_100R_1%, Supplier Part Number 1=1576263, Author=TvR, Checked by=Unchecked, CreationDate="30-Mar-16 10:33:13", id=288, MyComment=100R, Partname=Res0603MD_100R_1%, Precision=1%, Resistance=100R, Supplier 1=Farnell
R20: library part 3296Y-1-502LF, "5K, 25 Turn, Top adjust thruhole trimpot Bourns 100pm", Manufacturer=Bourns, Resistance=5K, Supplier Part Number 1=9353631, Author=EB, Checked by=Unchecked, CreationDate="29-Jun-23 07:57:20", id=64, ManufacturerCode=3296Y-1-502LF, MyComment=5K/25T, Partname=3296Y-1-502LF, Precision=±10%, Supplier 1=Farnell
R27 R28 R29 R31: library part Res0603MD_Generic, Author=Twe, Checked by=Unchecked, CreationDate="23-Mar-16 11:35:26", id=7, MyComment=<Value>, Partname=Res0603MD_Generic, Supplier 1=Farnell
R30: library part Res0603MD_270R_1%, Supplier Part Number 1=9330917, Author=Twe, Checked by=Unchecked, CreationDate="30-Mar-16 10:33:13", id=298, MyComment=270R, Partname=Res0603MD_270R_1%, Precision=1%, Resistance=270R, Supplier 1=Farnell
R32: library part Res0805HD_Generic, Author=Twe, Checked by=Unchecked, CreationDate="30-Mar-16 10:26:57", id=259, MyComment=<Value>, Partname=Res0805HD_Generic, Supplier 1=Farnell
T1 T2 T3: "JFET N Channel, VdgMax=40V, Idss=10 to 40mA, VgsOff=-1.2 to-2.7 V, SOT-23-3", Manufacturer=OnSemi, Supplier Part Number 1=2454011, Author=EB, Checked by=Unchecked, CreationDate="18-Oct-23 10:22:07", id=32, ManufacturerCode=MMBF5103, MyComment=MMBF5103, Partname=MMBF5103, Supplier 1=Farnell, Type="FET N"
T4 T5 T6: "JFET N Channel, VdgMax=40V, Idss=8 to ?mA, VgsOff=-1 to -5V, SOT-23-3", Manufacturer=OnSemi, Supplier Part Number 1=2992317, Author=EB, Checked by=Unchecked, CreationDate="18-Oct-23 10:33:18", id=33, ManufacturerCode=MMBF4093, MyComment=MMBF4093, Partname=MMBF4093, Supplier 1=Farnell, Type="FET N"
TP1 TP2 TP3 TP4: library part Testpoint_1.5mm, "Testpoint SMD pad 1.5mm", Author=EB, Checked by=PCB, CreationDate="31-Mar-16 13:33:27", id=143, MyComment=Testpoint, Partname=Testpoint_1.5mm, Type=Testpoint
U1 U3: "InAmp, noise=7 nV/√Hz, Ofs=10 µV, Bw=4.7MHz, ± 2.3V to ± 18V, 4.6V to 36V, ±40 input protection", Manufacturer="Anolog Devices", ManufacturerCode=INA821IDR, Supplier Part Number 1=595-INA821IDR, Author=EB, Checked by=Unchecked, CreationDate="18-Oct-23 14:25:23", id=238, MyComment=INA821ID, Partname=INA821ID, Supplier 1=Mouser, Type=InAmp
U2: "Dual OpAmp, 5.5MHz, Noise=7nV, Ibias=2pA, ±2.3 to ±18v, UnityGain stable, Sot23-5", Manufacturer="Analog Devices", Supplier Part Number 1=595-OPA2145IDR, Author=EB, Checked by=Unchecked, CreationDate="05-Jul-22 13:39:52", id=241, ManufacturerCode=OPA2145IDR, MyComment=OPA2145IDR, Partname=OPA2145IDR, Supplier 1=Mouser, Type=OpAmp
U4: "2-40V Window Comparator, internal ref (2.54/1.27V), open collector out", Manufacturer=OnSemi, Supplier Part Number 1=2774746, Author=EB, Checked by=Unchecked, CreationDate="27-Jun-23 08:40:04", id=227, ManufacturerCode=MC33161DMR2G, MyComment=MC33161DMR2G, Partname=MC33161DMR2G, Supplier 1=farnell, Type=Comparator

## Via types
v1: diameter 0.6, hole 0.25, Top Layer to Bottom Layer, tented both sides, 227 vias
v2: diameter 0.601, hole 0.25, Top Layer to Bottom Layer, tented both sides, 9 vias
v3: diameter 1.3, hole 0.8, Top Layer to Bottom Layer, tented both sides, 4 vias
v4: diameter 1.27, hole 0.5, Top Layer to Bottom Layer, 2 vias
v5: diameter 1, hole 0.5, Top Layer to Bottom Layer, tented both sides, 1 vias

## Nets (pads, with @x,y where several pads share a name; then routed paths per layer and width w, separated by ;. In a path a pad name is that pad's centre, name@x,y a point inside that pad or via, vN(x,y) a via of type N, cw(c..) or ccw(c..) an arc to the next point about the centre after c; other vN are vias at no path point)
0V_ACMod: D4.2 P9.2 R24.1 R25.2 U3.1
  other v1: 28.5,9 29.5,9 31.5,9 35.5,9 36.5,9 28,10 29,10 36,10 28.5,11 29.5,11 31.5,11 35.5,11 36.5,11 28,12 32,12 38.5,13 39.5,13 32,14 35.5,15 36.5,15 36,16 35.5,17 36.5,17
0V_DCMod: C6.2 D2.2 P8.2 R15.1 R18.2 U1.1 | length 1.7
  Top Layer w0.3: D2.2 11.505,14.385 R18.2 ; P8.2@21.06,10.44 P8.2@21.06,10.616
  other v1: 11,7 12,7 14,7 15,7 10.5,8 11.5,8 14.5,8 10,9 14,9 18,9 19,9 18.5,10 10,11 14,11 18,11 19,11 14.5,12 22.5,12 10,13 21,13 22,13 14.5,14 22.5,14 18,15 19,15 18.5,16 18,17 19,17
+6V: C8.2 C9.2 C12.1 D6.3 D9.2 J1.1 R26.1 U1.8 U2.8 U3.8 U4.8 | length 115.9
  Top Layer w0.3: C12.1 R26.1 ; U4.8 C12.1@57.944,7.956
  Top Layer w0.6: U1.8 24.995,7.305 C8.2 v2(25.9,7.3) ; v2(32.3,4.8) v2(32.3,7.3) ; v2(32.3,7.3) 32.305,7.305 U3.8 ; v2(44.9,7.3) 44.905,7.305 U2.8 ; v2(57,8) C12.1 C12.1@57.944,7.956
  Top Layer w1: v3(6.95,11.125) D6.3 7.089,12.175 7.875,12.961 7.875,14 C9.2 7.925,14.05 7.925,14.568 8.165,14.808 D9.2 8.165,16.609 7.074,17.7 4.5,17.7 3.2,19 3.2,38.9 10.6,46.3 11.44,46.3 J1.1
  Bottom Layer w0.6: v3(6.95,11.125) 6.95,8.05 8.9,6.1 18.2,6.1 19.4,7.3 v2(25.9,7.3) 26.9,6.3 31.3,6.3 v2(32.3,7.3) ; v2(32.3,4.8) 41.1,4.8 43.6,7.3 v2(44.9,7.3) 47.4,7.3 47.6,7.1 56.1,7.1 v2(57,8)
-6V: C10.1 C11.1 D7.1 D10.1 J1.5 U1.5 U2.4 U3.5 | length 110.2
  Top Layer w0.6: U1.5 C10.1@23.695,3.495 ; C10.1 C10.1@23.695,3.495 ; v2(24.5,3.5) 24.495,3.495 C10.1@23.695,3.495 ; v2(33,3.5) 33.652,3.5 33.657,3.495 U3.5 ; U2.4 41.383,3.495 41.388,3.5 v2(42.2,3.5)
  Top Layer w1: v3(2.2,8.575) D7.1 1.7,10.375 1.7,13.275 C11.1@2.275,13.85 ; C11.1 2.275,15.585 D10.1 1.35,16.51 1.35,39.75 9.55,47.95 9.55,48.65 12,51.1 21.7,51.1 22.9,49.9 22.9,46.816 22.54,46.456 J1.5
  Bottom Layer w0.6: v3(2.2,8.575) 4.425,8.575 9.505,3.495 20.495,3.495 20.5,3.5 v2(24.5,3.5) v2(33,3.5) v2(42.2,3.5)
"CurClt Vsense+": P5.2 R2.2 | length 6.5
  Top Layer w0.3: P5.2 13.5,38.88 13.5,42.1 13.975,42.575 13.975,42.875 R2.2
"CurCtl Anode": J1.8 P3.1 | length 15.6
  Bottom Layer w0.6: 16,36.3 16,40.9 ; 18.385,43.285 J1.8
  Bottom Layer w1: P3.1 16,36.3 ; 16,40.9 18.385,43.285
"CurCtl Cathode": J1.7 P4.3 | length 12.7
  Bottom Layer w0.6: 15.6,44 15.6,49.105 J1.7
  Bottom Layer w1: P4.3 12.64,43.1 14.7,43.1 15.6,44
GND: C8.1 C9.1 C10.2 C11.2 C12.2 C13.2 D2.1 D3.1 D4.1 D5.1 D6.1 D7.3 D9.1 D10.2 J1.3 P3.3 P4.1 R4.2 R18.1 R22.1 R25.1 R31.2 U1.6 U3.6 U4.4 U4.7 | length 5.4
  Top Layer w0.6: C11.2 4.025,15.485 4.265,15.725 D10.2 ; D9.1 5.935,15.725 6.15,15.51 C9.1 ; C10.2 23.725,5.1 23.949,5.324 23.949,5.349 24.3,5.7 C8.1
  other v1: 7.5,2.5 10,2.5 12.5,2.5 17.5,2.5 20,2.5 22.5,2.5 25,2.5 27.5,2.5 30,2.5 32.5,2.5 35,2.5 45,2.5 47.5,2.5 60,2.5 62.5,2.5 11.25,5 18.75,5 43.75,5 48.75,5 61.25,5 62.5,7.5 65,7.5 67.5,7.5 26.25,10 53.75,10 58.75,10 61.25,10 63.75,10 66.25,10 5,12.5 25,12.5 52.5,12.5 60,12.5 62.5,12.5 65,12.5 67.5,12.5 46.25,15 51.25,15 53.75,15 56.25,15 58.75,15 61.25,15 63.75,15 66.25,15 2.5,17.5 25,17.5 45,17.5 50,17.5 52.5,17.5 55,17.5 57.5,17.5 60,17.5 62.5,17.5 65,17.5 67.5,17.5 8.75,20 28.75,20 41.25,20 46.25,20 48.75,20 51.25,20 53.75,20 56.25,20 58.75,20 61.25,20 63.75,20 66.25,20 12.5,22.5 15,22.5 5,27.5 22.5,27.5 32.5,27.5 40,27.5 42.5,27.5 41.25,30 27.5,32.5 32.5,32.5 35,32.5 40,32.5 42.5,32.5 18.75,35 23.75,35 28.75,35 33.75,35 36.25,35 41.25,35 42.5,37.5 21.25,40 12.8,41.6 8.4,42 9.8,42 2.5,42.5 22.5,42.5 35,42.5 42.5,42.5 9.4,43.2 21.25,45 23.75,45 26.25,45 31.25,45 33.75,45 7.5,47.5 25,47.5 32.5,47.5 8.75,50 26.25,50 33.75,50 2.5,52.5 5,52.5 7.5,52.5 10,52.5 12.5,52.5 15,52.5 17.5,52.5 20,52.5 22.5,52.5 25,52.5 27.5,52.5 30,52.5 32.5,52.5
GND_TEC: D11.1 J2.7 P12.1
  other v1: 45,25 47.5,25 67.5,25 46.25,27.5 45,30 47.5,30 50,30 52.5,30 55,30 57.5,30 60,30 62.5,30 65,30 67.5,30 46.25,32.5 66.25,32.5 45,35 50,35 57.5,35 65,35 67.5,35 66.25,37.5 45,40 65,40 67.5,40 66.25,42.5 45,45 57.5,45 67.5,45 43.75,47.5 46.25,47.5 48.75,47.5 37.5,50 42.5,50 45,50 47.5,50 50,50 62.5,50 67.5,50 38.75,52.5 41.25,52.5 43.75,52.5 46.25,52.5 48.75,52.5 51.25,52.5 53.75,52.5 56.25,52.5 58.75,52.5 61.25,52.5 63.75,52.5 66.25,52.5
LD-Anode-In: C1.1 C2.1 C3.1 C4.1 C14.1 C15.1 L1.1 P3.2 P5.1 P7.2 R1.1 | length 44.8
  Top Layer w1: C3.1@8.5,32.675 8.5,31.275 8.775,31 10.688,31 11.013,31 13.4,31 C14.1 C15.1 17.575,31 18.405,30.17 18.57,30.17 18.57,30.345 18.6,30.375 18.775,30.375 21.1,32.7 25.8,32.7 ; C3.1@8.8,32.7 11.809,32.7 12.16,33.051 P5.1 P3.2 P7.2 ; C1.1@10.688,31.287 C1.1@11.013,31.287 ; L1.1 25.8,32.7 ; R1.1 28.8,37.3 25.8,34.3 25.8,32.7
LD-Anode-out: D1.1 P1.1 P7.3 R3.2 T1.1 T2.1 T3.1 T4.2 T5.2 T6.2 | length 54
  Top Layer w0.8: P1.1 T4.2 v4(20.9,21) T5.2 23.7,21 ; 23.8,21 T6.2@26.588,21 ; T6.2 T6.2@26.588,21 ; T3.1 31.223,21 31.214,21.009 26.597,21.009 T6.2@26.588,21 ; T3.1@33,21 T2.1 T1.1
  Top Layer w1: R3.2 19.75,40.95 18.88,40.08 P7.3 19.61,37.71 19.61,36.09 v5(21.6,34.1)
  Bottom Layer w1: v4(20.9,21) 20.9,33.4 v5(21.6,34.1)
LD-Cathode-In: C1.2 C2.2 C3.2 C4.2 C14.2 C15.2 L2.1 P4.2 P5.3 P6.2 R11.1 | length 64.7
  Top Layer w1: P5.3 P4.2 P6.2 5.251,37.54 4.9,37.189 4.9,33.051 5.251,32.7 C3.2 6.9,29.575 8.4,28.075 8.725,28.075 C2.2 C1.2 C14.2 C15.2 17.775,28 18.375,28.6 C4.2 19.4,28.6 21.754,30.954 22.654,30.954 v3(22.7,31) ; R11.1 41,37.927 36.8,33.727 v3(36.8,31) ; v3(36.8,31) L2.1 v3(36.8,31)
  Bottom Layer w1: v3(22.7,31) v3(36.8,31)
LD-Cathode-out: D1.2 P2.1 P6.1 R5.1 R6.1 R7.1 R8.1 R9.1 R10.1 R12.2 U2.5 | length 112.5
  Top Layer w0.3: 39.375,26.025 41.375,26.025 42.6,24.8 42.6,21.7 47.563,16.737 47.563,13.937 47.9,13.6 47.9,9.9 47.45,9.45 47.45,3.671 47.274,3.495 U2.5
  Top Layer w1: P2.1 12.15,25.15 14.95,25.15 D1.2 16.4,25.2 17.225,26.025 19.6,26.025 ; R8.1@19.6,24.525 19.6,26.025 ; R9.1 23.8,26.025 ; R10.1 27.9,26.025 ; R7.1 31.2,25.925 31.1,26.025 ; R12.2 32.875,42.075 32.875,39.425 v4(32.9,39.4) 31.1,37.6 31.1,26.025 ; R6.1 35.274,25.951 35.2,26.025 ; R5.1 39.4,26 39.375,26.025 35.2,26.025 ; 19.6,26.025 23.8,26.025 ; 23.8,26.025 27.9,26.025 ; 27.9,26.025 31.1,26.025 ; 31.1,26.025 35.2,26.025
  Bottom Layer w1: P6.1 7.08,33.735 7.915,32.9 18.4,32.9 24.9,39.4 v4(32.9,39.4)
"Led_TEC On+": J2.1 P11.1 R32.1 | length 10.5
  Top Layer w0.5: P11.1 58.5,42.925 58.2,43.225 R32.1 58.2,43.775 58.54,44.115 J2.1
NetC5_1: C5.1 R16.1 R17.2 R19.2 U2.2 | length 12.3
  Top Layer w0.3: C5.1@37.3,5.9 R16.1 39.055,6.035 U2.2 43.055,6.035 43.72,6.7 R17.2 R19.2
NetC5_2: C5.2 R16.2 R27.1 T1.3 T2.3 T3.3 T4.3 T5.3 T6.3 TP2.1 U2.1 | length 51.8
  Top Layer w0.3: T4.3 19.9,22.05 21.55,22.05 21.65,21.95 T5.3 T6.3 30.85,21.95 T2.3 T1.3 41.55,21.95 42.1,21.4 42.1,12.9 40.82,11.62 U2.1 ; C5.2@37.3,7.5 R16.2 39.115,7.305 40.5,7.305 U2.1 ; v1(43.12,8) 42.425,7.305 U2.1 ; TP2.1 48.83,7.33 48.83,7.848 48.9,7.919 v2(48.9,8) R27.1
  Bottom Layer w0.3: v1(43.12,8) 43.52,8.4 48.5,8.4 v2(48.9,8)
NetC6_1: C6.1 R13.2 U1.4 | length 11.6
  Top Layer w0.3: R13.2 13.02,3.779 13.444,3.355 13.444,3.276 13.725,2.995 15.445,2.995 15.945,3.495 U1.4
NetC7_1: C7.1 TP4.1 U3.7 | length 17.5
  Top Layer w0.3: U3.7 35.335,6.035 v1(35.37,6) ; v1(49.1,9.5) 49.1,10.5 C7.1
  Bottom Layer w0.3: v1(35.37,6) 39.9,6 43.4,9.5 v1(49.1,9.5)
NetC7_2: C7.2 R20.1 | length 5.6
  Top Layer w0.3: R20.1 48.76,14.36 50.12,13 50.12,11.305 50.8,10.625 C7.2
NetC13_1: C13.1 R30.1 | length 1.6
  Top Layer w0.3: C13.1 R30.1
NetD3_2: D3.2 P8.1 R13.1 R15.2 | length 9.1
  Top Layer w0.3: R13.1 11.42,11.425 12.662,12.667 12.728,12.667 R15.2 ; R15.2@13.065,12.98 P8.1@18.52,12.98 ; R15.2@13.087,13.3 13.278,13.3 13.32,13.342 D3.2
NetD5_2: D5.2 P9.1 R24.2 U3.4 | length 17.7
  Top Layer w0.3: U3.4@28.655,3.495 28.69,3.53 U3.4@28.82,3.53 ; U3.4 29.715,3.495 30.72,4.5 R24.2 ; D5.2 R24.2 ; P9.1@36.02,12.98 36,13 R24.2
NetD8_1: D8.1 R30.2 U4.5 U4.6 | length 12.8
  Top Layer w0.3: D8.1@53.55,13.1 56.1,10.55 56.1,5.9 56.946,5.054 U4.6 U4.5 58,4.404 58.1,4.304 R30.2
NetD8_2: D8.2 R26.2 | length 1.8
  Top Layer w0.3: D8.2@56.09,13.1 R26.2
NetD11_2: D11.2 R32.2 | length 3.6
  Top Layer w0.5: R32.2 56.5,41.7 56.94,41.26 56.94,40.1
NetJ1_6: J1.6 R4.1 | length 5.9
  Top Layer w0.3: R4.1 12.845,43.245 J1.6
NetJ1_9: J1.9 R2.1 | length 8.8
  Top Layer w0.3: R2.1 16.5,43.2 18.5,45.2 18.5,47 20.362,48.862 20.897,48.862 J1.9
NetL1_2: L1.2 R1.2 R3.1 | length 7.5
  Top Layer w1: L1.2 25.85,38.63 R3.1 25.85,43 26.1,43.25 26.1,43.2 R1.2
NetL2_2: L2.2 R11.2 R12.1 | length 8.2
  Top Layer w1: L2.2 36.8,41.4 37.5,42.1 R12.1 38.95,42.9 39.2,43.15 R11.2
NetP10_1: P10.1 R29.1 | length 2.2
  Top Layer w0.3: R29.1 50.134,4.466 50.134,3.826 50.8,3.16 P10.1
NetR5_2: R5.2 T1.2 | length 1.6
  Top Layer w0.6: T1.2 40.975,22.9 40.975,24.425 R5.2
NetR6_2: R6.2 T2.2 | length 1.6
  Top Layer w0.6: T2.2 36.874,22.9 R6.2
NetR7_2: R7.2 T3.2 | length 1.6
  Top Layer w0.6: T3.2 R7.2
NetR8_2: R8.2 T4.1 | length 1.8
  Top Layer w0.6: T4.1 17.5,23.975 18,24.475 R8.2
NetR9_2: R9.2 T5.1 | length 1.6
  Top Layer w0.6: T5.1 22.175,22.9 22.175,24.475 R9.2
NetR10_2: R10.2 T6.1 | length 1.6
  Top Layer w0.6: T6.1 R10.2
NetR14_1: R14.1 U1.2 | length 1.8
  Top Layer w0.3: R14.1 14.655,6.035 U1.2
NetR14_2: R14.2 U1.3 | length 2
  Top Layer w0.3: R14.2 14.645,4.4 15.01,4.765 U1.3
NetR17_1: R17.1 TP1.1 U1.7 | length 25.9
  Top Layer w0.3: v1(20.5,6) v1@20.535,6.035 ; v1(42.1,9.5) R17.1@42.1,10.58
  Top Layer w0.6: v1(20.5,6) 21.222,6 21.257,6.035 U1.7
  Bottom Layer w0.3: v1(20.5,6) 21,5.5 31.8,5.5 33,6.7 39.3,6.7 v1(42.1,9.5)
NetR19_1: R19.1 R20.2 R20.3 | length 6.2
  Top Layer w0.3: R20.3 43.739,15.381 46.22,12.9 R20.2 46.92,12.141 R19.1
NetR21_1: R21.1 U2.6 U2.7 | length 9.4
  Top Layer w0.3: R21.1 43.215,2.815 45.165,4.765 U2.6 U2.7
NetR21_2: R21.2 R22.2 TP3.1 U2.3 | length 5.1
  Top Layer w0.2: U2.3 U2.3@40.838,4.783
  Top Layer w0.3: TP3.1 37.2,4.1 37.515,4.415 R21.2 ; R21.2@38.92,4.4 39.52,4.4 39.885,4.765 U2.3
NetR23_1: R23.1 U3.2 | length 1.9
  Top Layer w0.3: R23.1 26.99,6.07 U3.2@28.82,6.07
NetR23_2: R23.2 U3.3 | length 2.1
  Top Layer w0.3: R23.2 26.945,4.4 27.345,4.8 U3.3@28.82,4.8
NetR27_2: R27.2 R28.1 U4.2 | length 3.7
  Top Layer w0.3: R27.2 R28.1 51.625,6.4 52.321,5.704 U4.2
NetR28_2: R28.2 R29.2 R31.1 U4.1 U4.3 | length 9.1
  Top Layer w0.3: R29.2 51.6,4.625 52.029,5.054 54.554,5.054 54.8,5.3 54.8,6 54.546,6.254 53.594,6.254 U4.1 53.2,6.354 53.1,6.454 R31.1 R28.2
TEC1+: J2.4 P15.1 | length 16.7
  Top Layer w1.5: J2.4 50.23,37.77 P15.1
TEC1-: J2.6 P17.1 | length 21.6
  Bottom Layer w1.5: J2.6 59.88,49.12 61,48 61,34 59.096,32.096 58.596,32.096 P17.1@58.5,32
TEC2+: J2.5 P16.1 | length 15.2
  Top Layer w1.5: J2.5 47.46,34.34 P16.1@49.8,32
TEC2-: J2.8 P18.1 | length 17.5
  Bottom Layer w0.6: 51.6,44.774 51.6,47.2
  Bottom Layer w1: 51.6,47.2 J2.8@51.6,49.105
  Bottom Layer w1.5: 51.6,44.774 51.6,36.9 52.6,35.9 P18.1@52.6,32
Th_a: J2.2 P13.1 | length 21.1
  Top Layer w0.5: J2.2 55.78,46.28 57.2,47.7 57.5,47.7 57.505,47.705 59.295,47.705 62.5,44.5 P13.1
Th_b: J2.3 P14.1 | length 31.1
  Top Layer w0.5: J2.3 53,50.5 53.5,51 57.5,51 63.5,45 63.5,34.5 64.904,33.096 64.904,32.204 P14.1
pads on no net: D6.2 D7.2 J1.2 J1.4 J1.M1 J1.M2 J2.9 J2.M1 J2.M2 MH1.0 MH2.0 MH3.0 MH4.0 MH5.0 MH6.0 P6.3 P7.1

## Polygon pours and split planes (outlines as drawn)
GND_TEC on Top Layer "GND_TEC_L01_P007" (solid, pour order 7): 35.5,56 69,56 69,22.5 44,22.5 44,45 35.5,45
GND on Top Layer "GND_L01_P006" (solid, pour order 6): 1,56 35,56 35,44.5 43.5,44.5 43.5,22 69,22 69,1 1,1
0V_ACMod on Top Layer "0V_ACMOD_L01_P003" (solid, pour order 3): 26.9,13.3 26.4,13.3 26.4,15.486 31.694,15.486 31.694,17.586 40.5,17.586 40.5,8.286 30.42,8.286 30.42,6.9 26.9,6.9
0V_DCMod on Top Layer "0V_DCMOD_L01_P001" (solid, pour order 1): 9.52,15.5 14.12,15.5 14.12,17.6 23.22,17.6 23.22,8.3 17.72,8.3 17.72,6.7 9.52,6.7
GND_TEC on Bottom Layer "GND_TEC_L04_P008" (solid, pour order 8): 35.5,56 69,56 69,22.5 44,22.5 44,45 35.5,45
GND on Bottom Layer "GND_L04_P005" (solid, remove dead copper, pour order 5): 1,56 35,56 35,44.5 43.5,44.5 43.5,22 69,22 69,1 1,1
0V_DCMod on Bottom Layer "0V_DCMOD_L04_P000" (solid, pour order 0): 9.52,15.5 14.12,15.5 14.12,17.6 23.22,17.6 23.22,8.3 17.72,8.3 17.72,6.7 9.52,6.7
0V_ACMod on Bottom Layer "0V_ACMOD_L04_P004" (solid, pour order 4): 26.92,15.486 31.694,15.486 31.694,17.586 40.794,17.586 40.794,8.286 30.42,8.286 30.42,6.7 26.92,6.7

## Silkscreen, mask and mechanical layers (free items; w line width, h text height)
Top Overlay:
  text "a" at 62.2,30.1 h0.8
  text "b" at 64.8,30.1 h0.8
  text "+" at 49.8,29.967 h0.8
  text "+" at 55.7,29.967 h0.8
  text "-" at 52.3,29.9 h0.8
  text "-" at 58.2,29.9 h0.8
  text "TEC.2" at 49.6,29 h0.8
  text "TEC.1" at 55.5,29 h0.8
  text "Therm." at 61.7,29 h0.8
  text "C" at 10.3,24.7 h0.8
  text "LD" at 10.5,22.7 h0.8
  text "University Of Amsterdam" at 42.6,21.833 h1
  text "A" at 10.3,20.6 h0.8
  text "LaserProtection_V10" at 42.6,20.267 h1
  text "Strontium BECgroup" at 42.6,18.633 h1
  text "TC-Baaij-11/2023" at 42.6,17.333 h0.7
Outline:
  the board outline again, w0.1
PCB-information:
  lines w0.1: 0,-9 30,-9 ; 0,-7 30,-7 ; 22.5,-11 22.5,-9 22.5,-7 ; 0,-11 0,-13 30,-13 30,-11 ; 0,-11 30,-11 ; 0,-11 0,-5 30,-5 30,-11
  text "University of Amsterdam / Technology Centre" at 0.5,-6.5 h1.5
  text ".authorname" at 0.5,-8.5 h1.5
  text ".Print_Date" at 23,-8.5 h1.52
  text ".projecttitle" at 0.5,-10.5 h1.5
  text "V.revisionnumber" at 23,-10.5 h1.5
  text "PCB Template: Eurocircuits 6C 4Layer" at 0.5,-12.5 h1.5
Assembly-notes:
  drawing of 200 lines, arcs and shapes, not listed
  text "Assembly instructions" at 2.5,-19 h4
  text "Production data information:" at 2.5,-26.5 h3
  text "-Components with a generic name (i.e. Res_0603MD_11k_1%) can be chosen freely by the assembler within" at 2.5,-29.5 h2
  text "the stated specifications." at 2.5,-32 h2
  text "-Markings on diodes and LEDs always indicate the Cathode." at 2.5,-34.5 h2
  text "Layer Stackup:" at 2.5,-124 h3
  text "Layer" at 4.5,-128 h1.52
  text "Name" at 10.878,-128 h1.52
  text "Material" at 23.21,-128 h1.52
  text "Thickness" at 34.294,-128 h1.52
  text "Constant" at 43.398,-128 h1.52
  text "Board Layer Stack" at 51.824,-128 h1.52
  text "Top Overlay" at 10.878,-131.048 h1.52
  text "Top Solder" at 10.878,-134.096 h1.52
  text "Solder Resist" at 23.21,-134.096 h1.52
  text "0.010mm" at 34.294,-134.096 h1.52
  text "3.5" at 43.398,-134.096 h1.52
  text "1" at 4.5,-137.144 h1.52
  text "Top Layer" at 10.878,-137.144 h1.52
  text "0.018mm" at 34.294,-137.144 h1.52
  text "Dielectric1" at 10.878,-140.192 h1.52
  text "FR-4" at 23.21,-140.192 h1.52
  text "0.360mm" at 34.294,-140.192 h1.52
  text "4.8" at 43.398,-140.192 h1.52
  text "2" at 4.499,-143.24 h1.52
  text "Signal Layer 1" at 10.878,-143.24 h1.52
  text "0.036mm" at 34.294,-143.24 h1.52
  text "Dielectric 3" at 10.878,-146.288 h1.52
  text "0.710mm" at 34.294,-146.288 h1.52
  text "4.2" at 43.398,-146.288 h1.52
  text "3" at 4.5,-149.336 h1.52
  text "Signal Layer 2" at 10.878,-149.336 h1.52
  text "0.036mm" at 34.294,-149.336 h1.52
  text "Dielectric 2" at 10.878,-152.384 h1.52
  text "0.360mm" at 34.294,-152.384 h1.52
  text "4.8" at 43.398,-152.384 h1.52
  text "4" at 4.5,-155.432 h1.52
  text "Bottom Layer" at 10.878,-155.432 h1.52
  text "0.018mm" at 34.294,-155.432 h1.52
  text "Bottom Solder" at 10.878,-158.48 h1.52
  text "Solder Resist" at 23.21,-158.48 h1.52
  text "0.010mm" at 34.294,-158.48 h1.52
  text "3.5" at 43.398,-158.48 h1.52
  text "Bottom Overlay" at 10.878,-161.528 h1.52

## Dimensions
35.1,57.1 to 68,0 on Dimension
0,0 to 70,75 on Dimension

## Text inside footprints (layer, text, board x,y; h text height)
J1: Top Designator "PCB Edge" at 16.6,58.55 h1.02 r180
J2: Top Designator "PCB Edge" at 52.6,58.55 h1.02 r180
R20: Top Overlay "cw" at 42.12,15.841 h0.5 r270